# EAGLE board akabeacon_circle_MDBT40 (EAGLE 7.4.0)
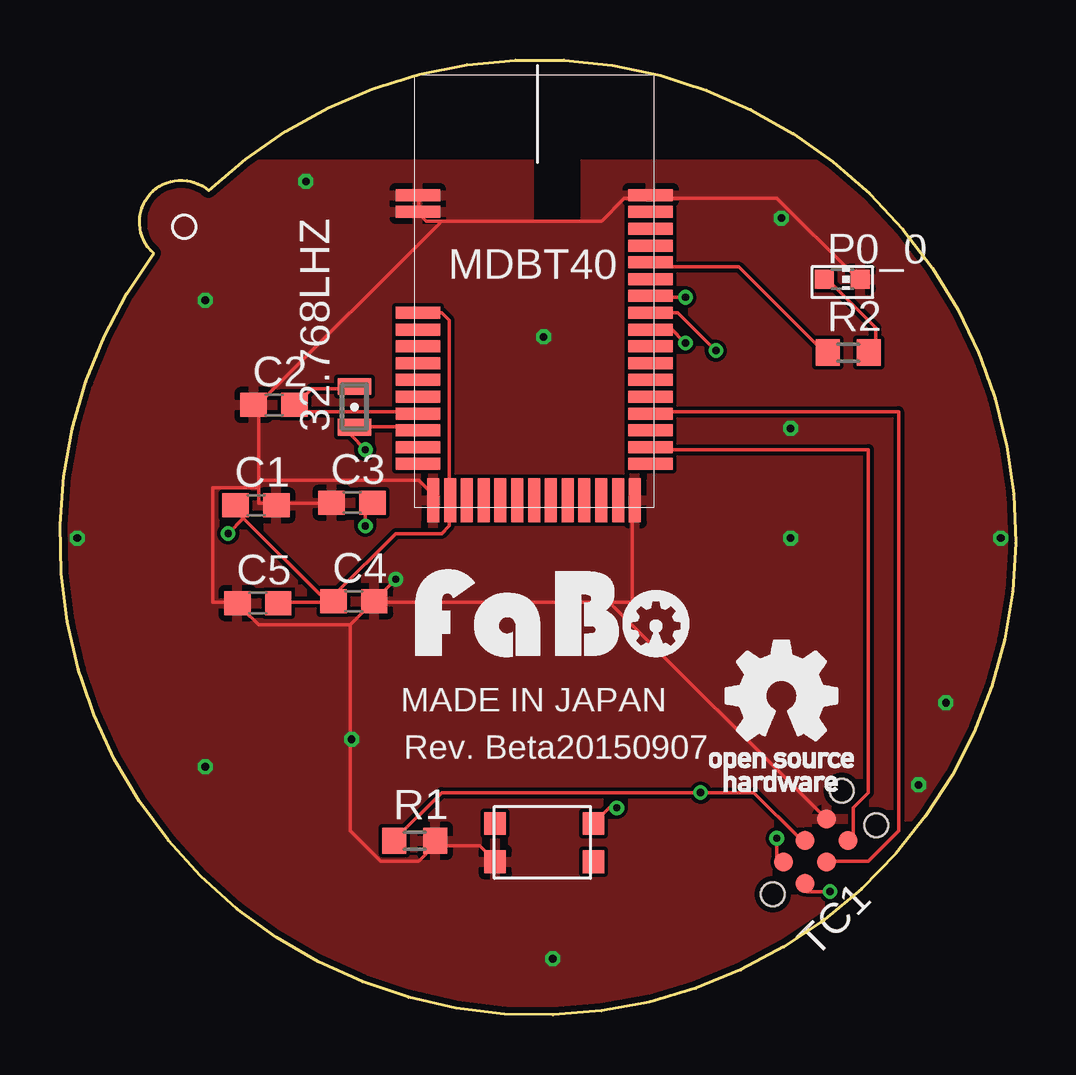
[diagram p0: board, top side]
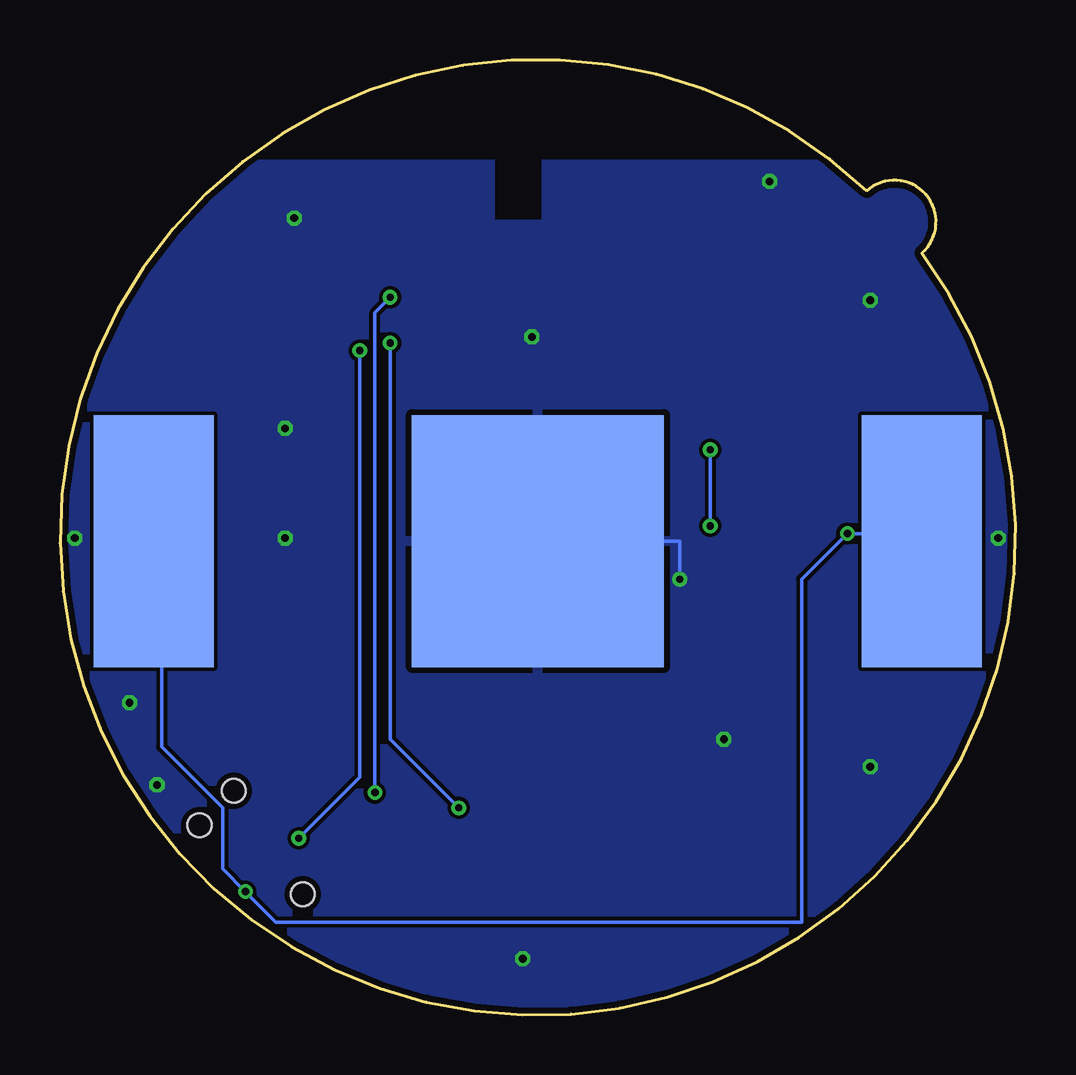
[diagram p1: board, bottom side, seen from below]

Size 39.81 x 39.79 mm. Coordinates in mm from the lower left corner, seen from the top.
Copper layers (1*16): Top 0.035mm / dielectric 1.5mm / Bottom 0.035mm
Design rules "SeeedStudio_2layer_DRU_no_angle_20140221": minimum track width 6mil, minimum drill 12mil, track to track 6mil, track to pad 6mil, pad to pad 6mil, via to via 6mil, smd to smd 0mil, copper to edge 10mil, drill to drill 10mil, minimum pad ring 10mil, minimum via ring 6mil, stop-mask expansion 2mil, vias tented up to drill 100mil, thermal gap 10mil

## Footprints (pad centres in the part's own frame; a part is rotated, then mirrored left to right if it is on the bottom)
FC-12M = smd 0.7 x 1.4: 1 -0.85,0; 2 0.85,0
C0603 = smd 1.1 x 1: 1 -0.85,0; 2 0.85,0
CHIP-LED0603 = smd 0.8 x 0.8: A 0,-0.75; C 0,0.75
R0603 = smd 1 x 1.1: 1 -0.85,0; 2 0.85,0
TC2030-IDC-NL = smd 0.787 x 0.787: 1 -1.27,-0.635; 2 -1.27,0.635; 3 0,-0.635; 4 0,0.635; 5 1.27,-0.635; 6 1.27,0.635 | hole 0.991: -2.54,0; 2.54,1.016; 2.54,-1.016
RAYTAC-MDBT40 = smd 1.85 x 0.5: 1 -4.86,4; 2 -4.86,3.3; 3 -4.86,-0.9; 4 -4.86,-1.6; 5 -4.86,-2.3; 6 -4.86,-3; 7 -4.86,-3.7; 8 -4.86,-4.4; 9 -4.86,-5.1; 10 -4.86,-5.8; 11 -4.86,-6.5; 12 -4.86,-7.2; 26 4.84,-7.2; 27 4.84,-6.5; 28 4.84,-5.8; 29 4.84,-5.1; 30 4.84,-4.4; 31 4.84,-3.7; 32 4.84,-3; 33 4.84,-2.3; 34 4.84,-1.6; 35 4.84,-0.9; 36 4.84,-0.2; 37 4.84,0.5; 38 4.84,1.2; 39 4.84,1.9; 40 4.84,2.6; 41 4.84,3.3; 42 4.84,4 | smd 0.5 x 1.85: 13 -4.22,-8.71; 14 -3.52,-8.71; 15 -2.82,-8.71; 16 -2.12,-8.71; 17 -1.42,-8.71; 18 -0.72,-8.71; 19 -0.02,-8.71; 20 0.68,-8.71; 21 1.38,-8.71; 22 2.08,-8.71; 23 2.78,-8.71; 24 3.48,-8.71; 25 4.18,-8.71
SWITCH-4P(KMR2) = smd 0.9 x 0.95: 1 -1,0; 2 3.1,0; 3 -1,-1.6; 4 3.1,-1.6
CIRCLE-TYE1-TC2030 = smd 10.5 x 10.5 bottom: GND 0,0 | smd 5 x 10.5 bottom: PLUS1 -16,0; PLUS2 16,0

## Placement (x,y rotation side)
32.768LHZ  FC-12M  [FC-12M]  12.27,25.34 90 top
C1  0.1uf  [C0603]  8.17,21.23 0 top
C2  12pf  [C0603]  8.92,25.42 0 top
C3  12pf  [C0603]  12.17,21.35 0 top
C4  0.1uf  [C0603]  12.25,17.23 0 top
C5  0.1uf  [C0603]  8.25,17.16 0 top
P0_0  [CHIP-LED0603]  32.6,30.66 270 top
R1  10K  [R0603]  14.78,7.26 0 top
R2  [R0603]  32.85,27.6 0 top
TC1  [TC2030-IDC-NL]  31.49,6.83 45 top
U$1  RAYTAC-MDBT40  [RAYTAC-MDBT40]  19.77,30.16 0 top
U$2  [LOGO_FABO_M]  20.53,14.92 0 top
U$4  [LOGO_OSHW_T_M]  30.06,13.28 0 top
U$5  SWICTH-4P(KMR2)  [SWITCH-4P(KMR2)]  19.13,7.98 0 top
U$7  CIRCLE-TYPE1  [CIRCLE-TYE1-TC2030]  19.9,19.74 0 top

## Library data of the parts
32.768LHZ = crystal
C1-C5 R1 R2 = adafruit
P0_0 = led
TC1 = TagConnect
U$1 = FaBo-BT
U$2 = FaBo
U$4 = gclue
U$5 = gclue-test
U$7 = GClue-Beacon

## Nets
+3V3: C1.1 C4.1 C5.2 TC1.1 U$1.3 U$1.14 U$7.PLUS1 U$7.PLUS2
GND: C1.2 C2.1 C3.1 C4.2 C5.1 P0_0.C R1.2 TC1.6 U$1.1 U$1.2 U$1.13 U$1.25 U$1.42 U$5.3 U$7.GND
N$1: P0_0.A R2.2
N$7: 32.768LHZ.2 C2.2 U$1.9
N$8: 32.768LHZ.1 C3.2 U$1.10
P0_00: U$1.17
P0_01: U$1.18
P0_02: U$1.19
P0_03: U$1.20
P0_04: U$1.21
P0_05: U$1.22
P0_06: U$1.23
P0_07: U$1.24
P0_08: U$1.26
P0_09: TC1.5 U$1.27
P0_10: U$1.28
P0_11: TC1.3 U$1.29
P0_12: U$1.30
P0_13: U$1.31
P0_14: U$1.32
P0_15: U$1.33
P0_16: U$1.34 U$5.2
P0_18: R2.1 U$1.38
P0_19: U$1.39
P0_21: U$1.4
P0_22: U$1.5
P0_23: U$1.6
P0_24: U$1.7
P0_25: U$1.8
P0_28: U$1.11
P0_29: U$1.12
P0_30: U$1.16
SWCLK: R1.1 TC1.4 U$1.36
SWDIO: TC1.2 U$1.35

## Tracks (layer width: path | path; a pad name or v marks a point on that pad's centre or on a via)
+3V3  (via drill 0.3)
  Top 0.152: v32.09,5.14 31.14,5.14 30.82,5.46 TC1.1 | C5.2 9.23,17.2 11.13,17.2 C4.1 | 7.64,20.7 10.82,17.52 11.13,17.52 C4.1 | 7.64,20.7 7.32,21.01 C1.1 | U$1.3 14.94,29.27 15.9,29.27 16.21,28.95 16.21,21.65 U$1.14 16.21,21.33 16.21,20.38 15.9,20.06 13.99,20.06 11.45,17.52 C4.1 | v7.01,20.06 7.64,20.7
  Bottom 0.152: U$7.PLUS2 35.58,19.74 35.58,11.17 33.04,8.63 33.04,6.09 v32.09,5.14 30.82,3.87 8.91,3.87 8.91,18.16 v7.01,20.06 4.15,20.06 4.15,19.74 U$7.PLUS1
GND  (via drill 0.3, 0.32)
  Top 0.152: C3.1 11.13,21.33 9.23,21.33 C1.2 8.91,21.33 8.28,21.33 8.28,21.97 | 8.28,21.97 8.28,22.28 | 8.28,22.28 8.28,25.14 C2.1 8.28,25.46 15.9,33.08 | 8.28,22.28 14.94,22.28 15.58,21.65 U$1.13 | 14.94,33.4 14.94,34.03 U$1.1 | P0_0.C 33.04,30.86 29.87,34.03 24.79,34.03 U$1.42 24.47,34.03 23.52,34.03 22.56,33.08 15.9,33.08 | 14.94,33.4 15.26,33.08 15.9,33.08 | 14.94,33.4 U$1.2 | U$5.3 18.12,6.41 17.48,7.04 15.9,7.04 R1.2 15.58,7.04 14.94,6.41 13.36,6.41 12.09,7.68 12.09,16.25 | 22.88,17.2 31.77,8.31 TC1.6 | 22.88,17.2 13.36,17.2 C4.2 | 12.09,16.25 8.28,16.25 7.64,16.89 C5.1 7.32,17.2 6.37,17.2 6.37,21.97 8.28,21.97 | 12.09,16.25 13.04,17.2 C4.2 | 22.88,17.2 23.83,17.2 23.83,21.33 U$1.25 | v13.99,18.16 13.36,17.52 C4.2
  Bottom 0.152: U$7.GND 13.99,19.74 v13.99,18.16
  other vias: 6.05,29.78 6.05,10.35 30.44,19.87 30.44,24.44 20.15,28.25 30.06,33.21 10.25,34.73 12.15,11.49 36.92,13.01 0.72,19.87 39.2,19.87 35.77,9.58 20.53,2.34
  pour Bottom: -3.47,-1.85 44.15,-1.85 44.15,36.63 -3.47,36.63
  pour Top: -3.47,-1.85 44.15,-1.85 44.15,36.63 -3.47,36.63
N$1
  Top 0.152: P0_0.A 32.09,30.54 33.99,28.63 33.99,27.68 R2.2
N$7
  Top 0.152: 32.768LHZ.2 12.09,26.09 10.5,26.09 9.86,25.46 C2.2 9.86,25.14 14.63,25.14 U$1.9
N$8  (via drill 0.3)
  Top 0.152: v12.72,20.38 12.72,21.33 C3.2 | v12.72,23.55 12.09,24.19 32.768LHZ.1 12.4,24.51 14.63,24.51 U$1.10
  Bottom 0.152: v12.72,23.55 v12.72,20.38
P0_09
  Top 0.152: TC1.5 33.04,7.36 33.04,8.63 33.68,9.27 33.68,23.55 24.79,23.55 U$1.27
P0_11
  Top 0.152: TC1.3 32.09,6.41 33.68,6.41 34.95,7.68 34.95,25.14 24.79,25.14 U$1.29
P0_16  (via drill 0.3)
  Top 0.152: v23.2,8.63 22.88,8.63 22.25,8 U$5.2 | v26.06,28 25.42,28.63 24.79,28.63 U$1.34
  Bottom 0.152: v23.2,8.63 26.06,11.49 v26.06,28
P0_18
  Top 0.152: R2.1 31.77,27.68 28.28,31.17 24.79,31.17 U$1.38
SWCLK  (via drill 0.3)
  Top 0.152: TC1.4 30.82,7.36 28.91,9.27 v26.69,9.27 15.9,9.27 13.99,7.36 R1.1 | v26.06,29.9 24.79,29.9 U$1.36
  Bottom 0.152: v26.06,29.9 26.69,29.27 v26.69,9.27
SWDIO  (via drill 0.3)
  Top 0.152: v29.87,7.36 29.87,6.41 TC1.2 | v27.33,27.68 25.74,29.27 24.79,29.27 U$1.35
  Bottom 0.152: v29.87,7.36 27.33,9.9 v27.33,27.68

## Text on the board
tPlace: MADE IN JAPAN | Rev. Beta20150907